# EAGLE board IRTx (EAGLE 9.5.1)

Size 60 x 60 mm. Coordinates in mm from the lower left corner, seen from the top.
Outline: circle at 30,30 radius 30
Copper layers (1*16): Top 0.035mm / dielectric 1.5mm / Bottom 0.035mm
Design rules "default *": minimum track width 0.5mm, minimum drill 0.35mm, track to track 12mil, track to pad 12mil, pad to pad 12mil, via to via 12mil, smd to smd 6mil, copper to edge 40mil, drill to drill 6mil, minimum pad ring 10mil, minimum via ring 8mil, stop-mask expansion 4mil, vias tented up to drill 0mil, thermal gap 10mil
Holes 5 mm at -7,38

## Footprints (pad centres in the part's own frame; a part is rotated, then mirrored left to right if it is on the bottom)
1X1-BIGPOGO = drill 1.4 pad 2.54 long: P$1 0,0
LED5MM = drill 0.813 pad 1.676 octagon: A -1.27,0 | drill 0.813 pad 1.676 square: K 1.27,0
0207/10 = drill 0.813 pad 1.676 octagon: 1 -5.08,0; 2 5.08,0

## Placement (x,y rotation side)
JP1  3.3  [1X1-BIGPOGO]  -29.63,38 90 top  (outside the outline)
JP2  GND  [1X1-BIGPOGO]  -28.81,53.52 90 top  (outside the outline)
LED1  [LED5MM]  -25.14,14.91 0 top  (outside the outline)
LED2  [LED5MM]  -5.89,47.91 0 top  (outside the outline)
LED3  [LED5MM]  3.01,42.2 0 top
LED4  [LED5MM]  3.64,28.23 0 top
LED5  [LED5MM]  -33.19,-35.91 0 top  (outside the outline)
LED6  [LED5MM]  -33.19,-42.9 0 top  (outside the outline)
LED7  [LED5MM]  -33.19,-49.88 0 top  (outside the outline)
LED8  [LED5MM]  -33.19,-56.87 0 top  (outside the outline)
R9  1k  [0207/10]  -20.49,28.23 0 top  (outside the outline)

## Library data of the parts
JP1 JP2 LED1-LED8 R9 = adafruit

## Nets
GND: JP2.P$1 LED1.K LED2.K LED3.K LED4.K LED5.K LED6.K LED7.K LED8.K
N$1: LED1.A LED2.A LED3.A LED4.A LED5.A LED6.A LED7.A LED8.A R9.1
VCC: JP1.P$1 R9.2

## Tracks (layer width: path | path; a pad name or v marks a point on that pad's centre or on a via)
GND  (8 unrouted)
N$1  (8 unrouted)
VCC  (1 unrouted)

## Text on the board
Top: - | SWARMESH / IRTx v3 / 2019-11-02 | +